# Altium PCB NODE_Module.PcbDoc (part 2 of 3)
Units mil, origin at the board's own origin, x right, y up, seen from the top; angles counter-clockwise.
Board outline 4300 x 3800 mil, 4 copper layers (Top Layer, Int1 (GND), Int2 (GND), Bottom Layer), stack 43.712 mil thick; 95 components, 106 nets, 420 pads, 98 vias.
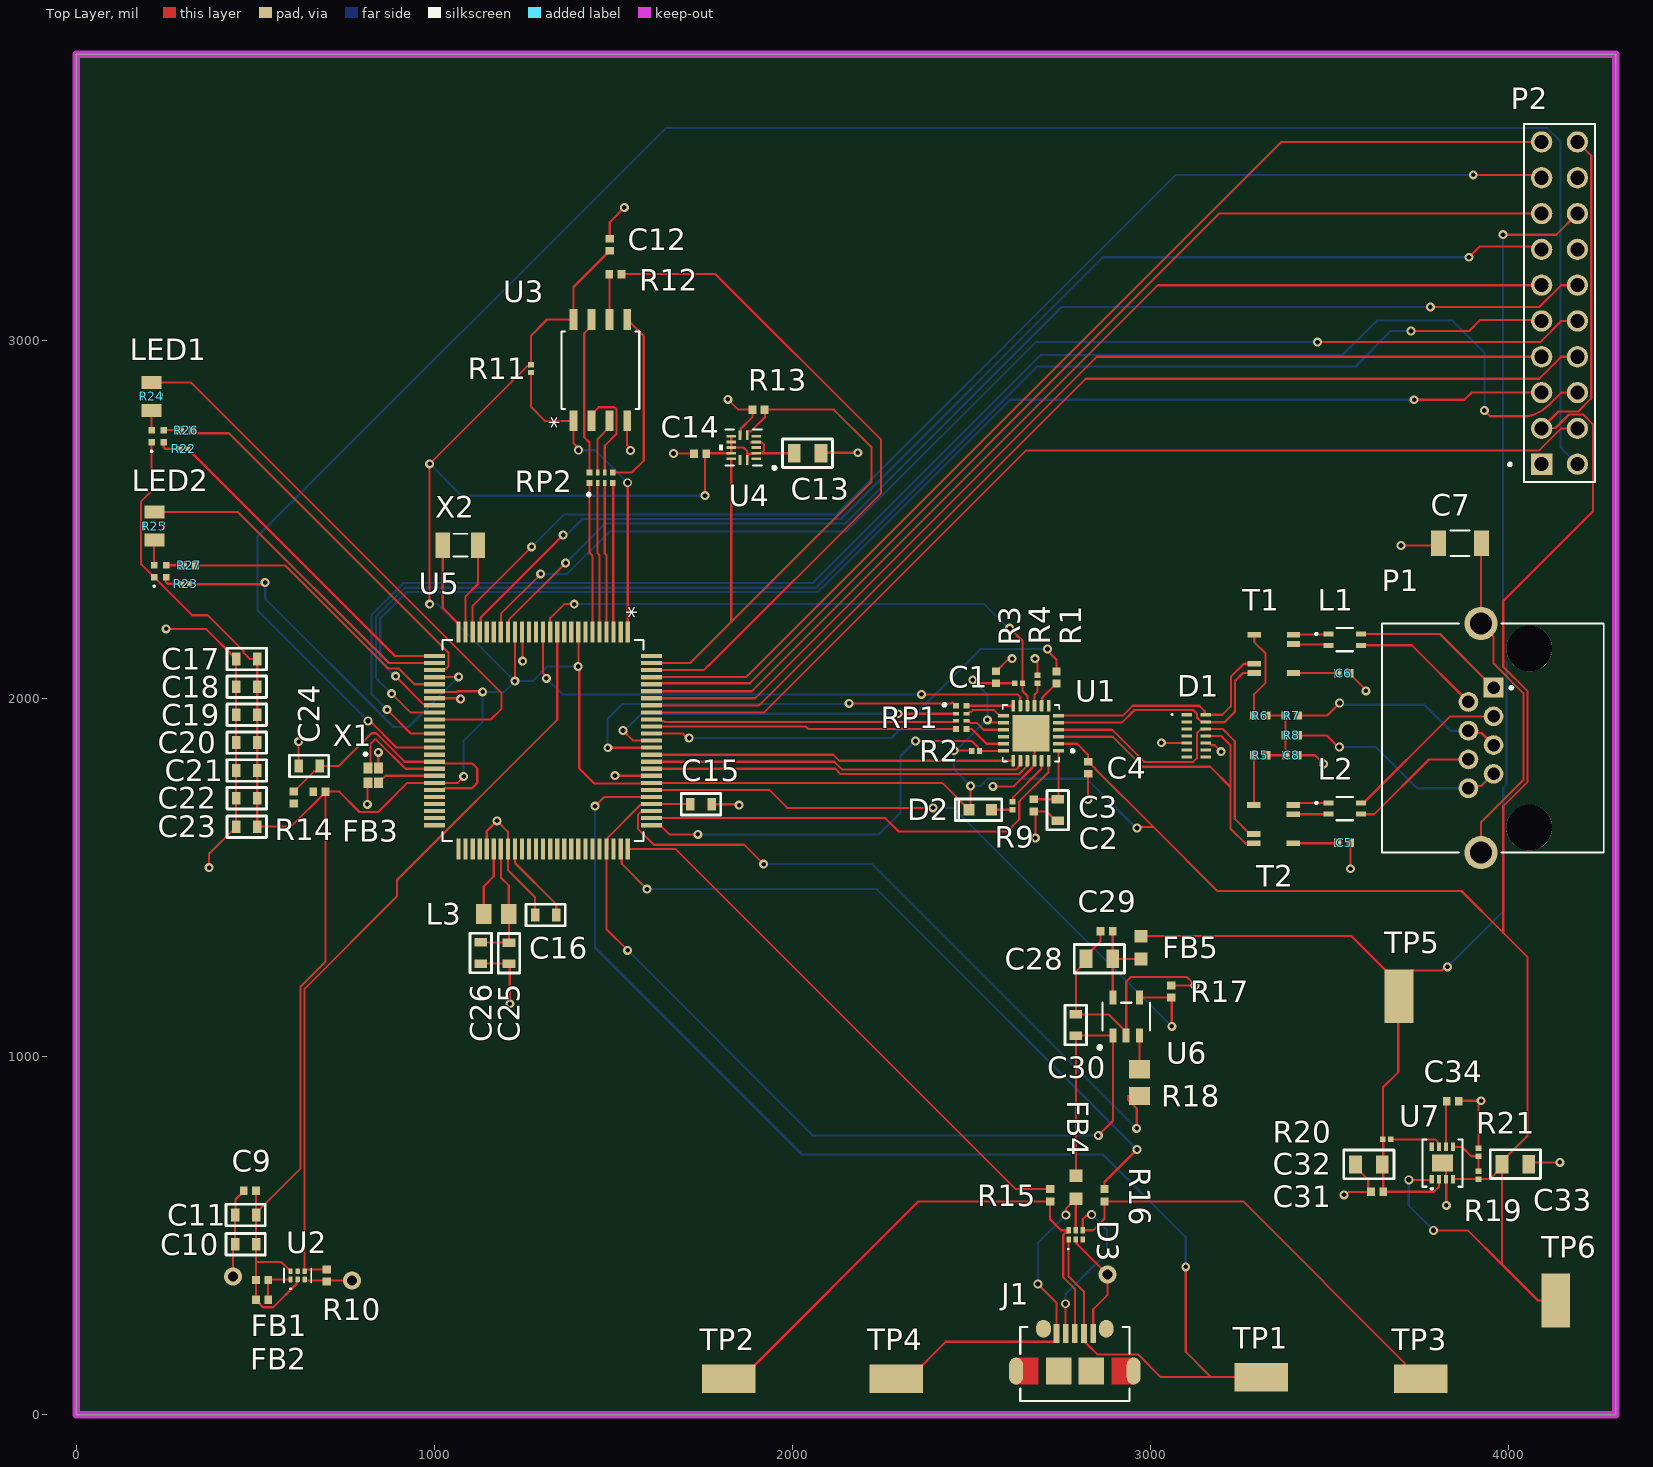
[diagram p0: Top Layer view]

## Part data (continued)
R5 R6 R7 R8: library part CRCW040275R0FKED, "VISHAY         CRCW040275R0FKED.            Surface Mount Chip Resistor, Thick Film, AEC-Q200 CRCW Series, 75 ohm, 63 mW,  1%, 50 V", Case Code (Imperial)=0402, Case Code (Metric)=1005, Manufacturer=Vishay, Max Operating Temperature=155°C, Max Power Dissipation=63mW, Min Operating Temperature=-55°C, Package Quantity=10, Resistor Type="Thick Film", Supplier Part Number 1=541-75.0LCT-ND, Temperature Coefficient=100ppm/°C, Tolerance=1%, Voltage Rating=50V, Case/Package=0402, Category="Chip SMD Resistors", ComponentLink1Description=https://datasheet.ciiva.com/11811/0900766b80d98824-11811348.pdf?src-supplier=RSComponents, ComponentLink1URL=https://datasheet.ciiva.com/11811/0900766b80d98824-11811348.pdf?src-supplier=RSComponents, ComponentLink2Description=https://datasheet.ciiva.com/2463/dcrcwe3-2463217.pdf?src-supplier=Digi-Key, ComponentLink2URL=https://datasheet.ciiva.com/2463/dcrcwe3-2463217.pdf?src-supplier=Digi-Key, ComponentLink3Description=https://datasheet.ciiva.com/2463/dcrcwe3-2463218.pdf?src-supplier=Digi-Key, ComponentLink3URL=https://datasheet.ciiva.com/2463/dcrcwe3-2463218.pdf?src-supplier=Digi-Key, ComponentLink4Description=https://datasheet.ciiva.com/2463/dcrcwe3-2463219.pdf?src-supplier=Digi-Key, ComponentLink4URL=https://datasheet.ciiva.com/2463/dcrcwe3-2463219.pdf?src-supplier=Digi-Key, ComponentLink5Description=https://datasheet.ciiva.com/16779/70201119-16779527.pdf?src-supplier=Allied+Electronics, ComponentLink5URL=https://datasheet.ciiva.com/16779/70201119-16779527.pdf?src-supplier=Allied+Electronics, ComponentLink6Description=https://datasheet.ciiva.com/16885/dcrcwe3-16885703.pdf?src-supplier=Avnet+Europe, ComponentLink6URL=https://datasheet.ciiva.com/16885/dcrcwe3-16885703.pdf?src-supplier=Avnet+Europe, ComponentLink7Description=https://datasheet.ciiva.com/7673/1697337-7673451.pdf?src-supplier=Element14, ComponentLink7URL=https://datasheet.ciiva.com/7673/1697337-7673451.pdf?src-supplier=Element14, ComponentLink8Description=https://datasheet.ciiva.com/7673/1697337-7673279.pdf?src-supplier=Element14, ComponentLink8URL=https://datasheet.ciiva.com/7673/1697337-7673279.pdf?src-supplier=Element14, Contact Plating=Tin, Depth=0.5mm, Features="Automotive AEC-Q200", Height=0.35mm, Lead Free="Lead Free", Length=1mm, Manufacturer Part Number=CRCW040275R0FKED, Military Standard=Not, Number of Terminations=2, Packaging="Tape and Reel", Power Rating=63mW, Pricing 1="1=0.10000, 10=0.03300, 100=0.01330, 1000=0.00596, 2500=0.00518, 5000=0.00428 (USD)", Radiation Hardening=No, REACH SVHC=Unknown, Resistance=75R, RoHS=Yes, Stock 1=3085, Supplier 1=Digi-Key, Termination=SMD/SMT, Voltage Rating (DC)=50V, Weight=2.3E-05oz, Width=0.5mm, Working Voltage=50V
R10 R13 R17: library part CRCW040210M0FKED, "RESISTOR, 0402, 10M, 1%, FULL REEL; Product Range:VISHAY - AEC-Q200 CRCW Series; Resistance:10Mohm; Power Rating:63mW; Resistance Tolerance:± 1%; Resistor Case Style:0402 [1005 Metric]; Resistor Element Material:Thick Film; ;RoHS Compliant: Yes", Case Code (Imperial)=0402, Case Code (Metric)=1005, Manufacturer=Vishay, Max Operating Temperature=155°C, Max Power Dissipation=63mW, Min Operating Temperature=-55°C, Package Quantity=10, Resistance=10MR, Resistor Type="Thick Film", Supplier Part Number 1=541-10.0MLCT-ND, Temperature Coefficient=100ppm/°C, Tolerance=1%, Voltage Rating=50V, Case/Package=0402, Category="Chip SMD Resistors", ComponentLink1Description=https://datasheet.ciiva.com/11811/0900766b80d98824-11811586.pdf?src-supplier=RSComponents, ComponentLink1URL=https://datasheet.ciiva.com/11811/0900766b80d98824-11811586.pdf?src-supplier=RSComponents, ComponentLink2Description=https://datasheet.ciiva.com/2463/dcrcwe3-2463089.pdf?src-supplier=Digi-Key, ComponentLink2URL=https://datasheet.ciiva.com/2463/dcrcwe3-2463089.pdf?src-supplier=Digi-Key, ComponentLink3Description=https://datasheet.ciiva.com/2463/dcrcwe3-2463088.pdf?src-supplier=Digi-Key, ComponentLink3URL=https://datasheet.ciiva.com/2463/dcrcwe3-2463088.pdf?src-supplier=Digi-Key, ComponentLink4Description=https://datasheet.ciiva.com/2463/dcrcwe3-2463090.pdf?src-supplier=Digi-Key, ComponentLink4URL=https://datasheet.ciiva.com/2463/dcrcwe3-2463090.pdf?src-supplier=Digi-Key, ComponentLink5Description=https://datasheet.ciiva.com/5552/dcrcwe3-109170-5552597.pdf?src-supplier=Mouser, ComponentLink5URL=https://datasheet.ciiva.com/5552/dcrcwe3-109170-5552597.pdf?src-supplier=Mouser, ComponentLink6Description=https://datasheet.ciiva.com/16881/dcrcwe3-16881451.pdf?src-supplier=Avnet+Europe, ComponentLink6URL=https://datasheet.ciiva.com/16881/dcrcwe3-16881451.pdf?src-supplier=Avnet+Europe, ComponentLink7Description=https://datasheet.ciiva.com/26316/fld-crcw-e3-data-en-26316614.pdf?src-supplier=Distrelec, ComponentLink7URL=https://datasheet.ciiva.com/26316/fld-crcw-e3-data-en-26316614.pdf?src-supplier=Distrelec, ComponentLink8Description=https://datasheet.ciiva.com/16773/70201119-16773258.pdf?src-supplier=Allied+Electronics, ComponentLink8URL=https://datasheet.ciiva.com/16773/70201119-16773258.pdf?src-supplier=Allied+Electronics, Contact Plating=Tin, Depth=0.5mm, Features="Automotive AEC-Q200", Height=0.35mm, Lead Free="Lead Free", Length=1mm, Manufacturer Part Number=CRCW040210M0FKED, Military Standard=Not, Mount="Surface Mount", Number of Terminations=2, Packaging="Tape and Reel", Power Rating=63mW, Pricing 1="1=0.10000, 10=0.03300, 100=0.01330, 1000=0.00596, 2500=0.00518, 5000=0.00428 (USD)", Radiation Hardening=No, REACH SVHC=Unknown, RoHS=Yes, Stock 1=167645, Supplier 1=Digi-Key, Termination=SMD/SMT, Voltage Rating (DC)=50V, Weight=2.3E-05oz, Width=0.02inch
R11: library part CRCW0201330KFNED, "VISHAY   CRCW0201330KFNED   Surface Mount Chip Resistor, Thick Film, AEC-Q200 CRCW Series, 330 kohm, 50 mW,  1%, 30 V", Case Code (Imperial)=0201, Case Code (Metric)=0603, Manufacturer=Vishay, Max Operating Temperature=155°C, Max Power Dissipation=50mW, Min Operating Temperature=-55°C, Package Quantity=10000, Resistance=330kR, Resistor Type="Thick Film", Supplier Part Number 1=541-CRCW0201330KFNEDCT-ND, Temperature Coefficient=200ppm/°C, Tolerance=1%, Voltage Rating=30V, Case/Package=0201, Category="Chip SMD Resistors", ComponentLink1Description=https://datasheet.ciiva.com/22708/1719906-22708398.pdf?src-supplier=Element14, ComponentLink1URL=https://datasheet.ciiva.com/22708/1719906-22708398.pdf?src-supplier=Element14, Contact Plating=Tin, Height=0.011inch, Lead Free="Lead Free", Length=0.024inch, Manufacturer Part Number=CRCW0201330KFNED, Number of Terminations=2, Packaging="Tape and Reel", Power Rating=50mW, Pricing 1="1=0.10000, 10=0.05700, 100=0.02300, 1000=0.01034, 2500=0.00897, 5000=0.00741 (USD)", Radiation Hardening=No, REACH SVHC=Unknown, RoHS=Yes, Stock 1=7255, Supplier 1=Digi-Key, Voltage Rating (DC)=30V, Width=0.012inch
R12: library part CRCW040222R0FKED, "VISHAY - CRCW040222R0FKED. - Resistor Case Style:0402 [1005 Metric], 22ohm", Case Code (Imperial)=0402, Case Code (Metric)=1005, Manufacturer=Vishay, Max Operating Temperature=155°C, Max Power Dissipation=63mW, Min Operating Temperature=-55°C, Package Quantity=10, Resistor Type="Thick Film", Supplier Part Number 1=541-22.0LCT-ND, Temperature Coefficient=100ppm/°C, Tolerance=1%, Voltage Rating=50V, Case/Package=0402, Category="Chip SMD Resistors", ComponentLink1Description=https://datasheet.ciiva.com/11809/0900766b80d98824-11809869.pdf?src-supplier=RSComponents, ComponentLink1URL=https://datasheet.ciiva.com/11809/0900766b80d98824-11809869.pdf?src-supplier=RSComponents, ComponentLink2Description=https://datasheet.ciiva.com/3256/dcrcwe3-3256250.pdf?src-supplier=Avnet, ComponentLink2URL=https://datasheet.ciiva.com/3256/dcrcwe3-3256250.pdf?src-supplier=Avnet, ComponentLink3Description=https://datasheet.ciiva.com/16776/70201119-16776426.pdf?src-supplier=Allied+Electronics, ComponentLink3URL=https://datasheet.ciiva.com/16776/70201119-16776426.pdf?src-supplier=Allied+Electronics, ComponentLink4Description=https://datasheet.ciiva.com/26316/fld-crcw-e3-data-en-26316666.pdf?src-supplier=Distrelec, ComponentLink4URL=https://datasheet.ciiva.com/26316/fld-crcw-e3-data-en-26316666.pdf?src-supplier=Distrelec, ComponentLink5Description=https://datasheet.ciiva.com/16886/dcrcwe3-16886668.pdf?src-supplier=Avnet+Europe, ComponentLink5URL=https://datasheet.ciiva.com/16886/dcrcwe3-16886668.pdf?src-supplier=Avnet+Europe, ComponentLink6Description=https://datasheet.ciiva.com/7672/1697337-7672781.pdf?src-supplier=Element14, ComponentLink6URL=https://datasheet.ciiva.com/7672/1697337-7672781.pdf?src-supplier=Element14, ComponentLink7Description=https://datasheet.ciiva.com/7672/1697337-7672782.pdf?src-supplier=Element14, ComponentLink7URL=https://datasheet.ciiva.com/7672/1697337-7672782.pdf?src-supplier=Element14, ComponentLink8Description=https://datasheet.ciiva.com/2463/dcrcwe3-2463093.pdf?src-supplier=Digi-Key, ComponentLink8URL=https://datasheet.ciiva.com/2463/dcrcwe3-2463093.pdf?src-supplier=Digi-Key, ComponentLink9Description=https://datasheet.ciiva.com/16396/dcrcwe3-16396918.pdf?src-supplier=Future+Electronics, ComponentLink9URL=https://datasheet.ciiva.com/16396/dcrcwe3-16396918.pdf?src-supplier=Future+Electronics, ComponentLink10Description=https://datasheet.ciiva.com/3256/dcrcwe3-3256249.pdf?src-supplier=Avnet, ComponentLink10URL=https://datasheet.ciiva.com/3256/dcrcwe3-3256249.pdf?src-supplier=Avnet, ComponentLink11Description=https://datasheet.ciiva.com/5552/dcrcwe3-109170-5552201.pdf?src-supplier=Mouser, ComponentLink11URL=https://datasheet.ciiva.com/5552/dcrcwe3-109170-5552201.pdf?src-supplier=Mouser, ComponentLink12Description=https://datasheet.ciiva.com/2463/dcrcwe3-2463091.pdf?src-supplier=Digi-Key, ComponentLink12URL=https://datasheet.ciiva.com/2463/dcrcwe3-2463091.pdf?src-supplier=Digi-Key, ComponentLink13Description=https://datasheet.ciiva.com/2463/dcrcwe3-2463092.pdf?src-supplier=Digi-Key, ComponentLink13URL=https://datasheet.ciiva.com/2463/dcrcwe3-2463092.pdf?src-supplier=Digi-Key, Contact Plating=Tin, Depth=0.5mm, Features="Automotive AEC-Q200", Height=0.35mm, Lead Free="Lead Free", Length=1mm, Manufacturer Part Number=CRCW040222R0FKED, Military Standard=Not, Mount="Surface Mount", Number of Terminations=2, Packaging="Tape and Reel", Power Rating=63mW, Pricing 1="1=0.10000, 10=0.03300, 100=0.01330, 1000=0.00596, 2500=0.00518, 5000=0.00428 (USD)", Radiation Hardening=No, REACH SVHC=Unknown, Resistance=22R, RoHS=Yes, Stock 1=167744, Supplier 1=Digi-Key, Termination=SMD/SMT, Voltage Rating (DC)=50V, Weight=2.3E-05oz, Width=0.02inch
R14: library part CRCW04021R00FNED, "RES SMD 1 OHM 1% 1/16W 0402", Case Code (Imperial)=0402, Case Code (Metric)=1005, Manufacturer=Vishay, Max Operating Temperature=155°C, Max Power Dissipation=63mW, Min Operating Temperature=-55°C, Package Quantity=10000, Resistor Type="Thick Film", Supplier Part Number 1=541-1.00LCT-ND, Temperature Coefficient=200ppm/°C, Tolerance=1%, Voltage Rating=50V, Case/Package=0402, Category="Chip SMD Resistors", ComponentLink1Description=https://datasheet.ciiva.com/2560/dcrcwe3-2560101.pdf?src-supplier=Digi-Key, ComponentLink1URL=https://datasheet.ciiva.com/2560/dcrcwe3-2560101.pdf?src-supplier=Digi-Key, ComponentLink2Description=https://datasheet.ciiva.com/6027/1697337-6027861.pdf?src-supplier=Farnell, ComponentLink2URL=https://datasheet.ciiva.com/6027/1697337-6027861.pdf?src-supplier=Farnell, ComponentLink3Description=https://datasheet.ciiva.com/2560/dcrcwe3-2560102.pdf?src-supplier=Digi-Key, ComponentLink3URL=https://datasheet.ciiva.com/2560/dcrcwe3-2560102.pdf?src-supplier=Digi-Key, ComponentLink4Description=https://datasheet.ciiva.com/2560/dcrcwe3-2560103.pdf?src-supplier=Digi-Key, ComponentLink4URL=https://datasheet.ciiva.com/2560/dcrcwe3-2560103.pdf?src-supplier=Digi-Key, ComponentLink5Description=https://datasheet.ciiva.com/3256/dcrcwe3-3256199.pdf?src-supplier=Avnet, ComponentLink5URL=https://datasheet.ciiva.com/3256/dcrcwe3-3256199.pdf?src-supplier=Avnet, ComponentLink6Description=https://datasheet.ciiva.com/3256/dcrcwe3-3256200.pdf?src-supplier=Avnet, ComponentLink6URL=https://datasheet.ciiva.com/3256/dcrcwe3-3256200.pdf?src-supplier=Avnet, ComponentLink7Description=https://datasheet.ciiva.com/5552/dcrcwe3-109170-5552232.pdf?src-supplier=Mouser, ComponentLink7URL=https://datasheet.ciiva.com/5552/dcrcwe3-109170-5552232.pdf?src-supplier=Mouser, ComponentLink8Description=https://datasheet.ciiva.com/16436/dcrcwe3-16436173.pdf?src-supplier=Future+Electronics, ComponentLink8URL=https://datasheet.ciiva.com/16436/dcrcwe3-16436173.pdf?src-supplier=Future+Electronics, ComponentLink9Description=https://datasheet.ciiva.com/7841/125364-7841807.pdf?src-supplier=Element14, ComponentLink9URL=https://datasheet.ciiva.com/7841/125364-7841807.pdf?src-supplier=Element14, Contact Plating=Tin, Depth=0.5mm, Features="Automotive AEC-Q200", Height=0.016inch, Lead Free="Lead Free", Length=1mm, Manufacturer Part Number=CRCW04021R00FNED, Military Standard=Not, Mount="Surface Mount", Number of Pins=2, Number of Terminations=2, Packaging="Tape and Reel", Power Rating=63mW, Pricing 1="1=0.10000, 10=0.05000, 100=0.02040, 1000=0.00914, 2500=0.00794, 5000=0.00656 (USD)", Radiation Hardening=No, REACH SVHC=Unknown, Resistance=1R, RoHS=Yes, Stock 1=16685, Supplier 1=Digi-Key, Termination=SMD/SMT, Voltage Rating (DC)=50V, Weight=2.3E-05oz, Width=0.02inch
R15 R16: library part CRCW040215R0FKED, "VISHAY - CRCW040215R0FKED - SMD Chip Resistor, 0402 [1005 Metric], 15 ohm, CRCW e3 Series, 50 V, Thick Film, 63 mW", Case Code (Imperial)=0402, Case Code (Metric)=1005, Manufacturer=Vishay, Max Operating Temperature=155°C, Max Power Dissipation=63mW, Min Operating Temperature=-55°C, Package Quantity=10, Resistor Type="Thick Film", Supplier Part Number 1=541-15.0LCT-ND, Temperature Coefficient=100ppm/°C, Tolerance=1%, Voltage Rating=50V, Case/Package=0402, Category="Chip SMD Resistors", ComponentLink1Description=https://datasheet.ciiva.com/11812/0900766b80d98824-11812193.pdf?src-supplier=RSComponents, ComponentLink1URL=https://datasheet.ciiva.com/11812/0900766b80d98824-11812193.pdf?src-supplier=RSComponents, ComponentLink2Description=https://datasheet.ciiva.com/5550/dcrcwe3-109170-5550213.pdf?src-supplier=Mouser, ComponentLink2URL=https://datasheet.ciiva.com/5550/dcrcwe3-109170-5550213.pdf?src-supplier=Mouser, ComponentLink3Description=https://datasheet.ciiva.com/2463/dcrcwe3-2463641.pdf?src-supplier=Digi-Key, ComponentLink3URL=https://datasheet.ciiva.com/2463/dcrcwe3-2463641.pdf?src-supplier=Digi-Key, ComponentLink4Description=https://datasheet.ciiva.com/2463/dcrcwe3-2463642.pdf?src-supplier=Digi-Key, ComponentLink4URL=https://datasheet.ciiva.com/2463/dcrcwe3-2463642.pdf?src-supplier=Digi-Key, ComponentLink5Description=https://datasheet.ciiva.com/16778/70201119-16778045.pdf?src-supplier=Allied+Electronics, ComponentLink5URL=https://datasheet.ciiva.com/16778/70201119-16778045.pdf?src-supplier=Allied+Electronics, ComponentLink6Description=https://datasheet.ciiva.com/7777/1697337-7777205.pdf?src-supplier=Element14, ComponentLink6URL=https://datasheet.ciiva.com/7777/1697337-7777205.pdf?src-supplier=Element14, ComponentLink7Description=https://datasheet.ciiva.com/2463/dcrcwe3-2463640.pdf?src-supplier=Digi-Key, ComponentLink7URL=https://datasheet.ciiva.com/2463/dcrcwe3-2463640.pdf?src-supplier=Digi-Key, ComponentLink8Description=https://datasheet.ciiva.com/26316/fld-crcw-e3-data-en-26316664.pdf?src-supplier=Distrelec, ComponentLink8URL=https://datasheet.ciiva.com/26316/fld-crcw-e3-data-en-26316664.pdf?src-supplier=Distrelec, ComponentLink9Description=https://datasheet.ciiva.com/16880/dcrcwe3-16880876.pdf?src-supplier=Avnet+Europe, ComponentLink9URL=https://datasheet.ciiva.com/16880/dcrcwe3-16880876.pdf?src-supplier=Avnet+Europe, ComponentLink10Description=https://datasheet.ciiva.com/22869/70201119-22869118.pdf?src-supplier=Allied+Electronics, ComponentLink10URL=https://datasheet.ciiva.com/22869/70201119-22869118.pdf?src-supplier=Allied+Electronics, ComponentLink11Description=https://datasheet.ciiva.com/16393/dcrcwe3-16393535.pdf?src-supplier=Future+Electronics, ComponentLink11URL=https://datasheet.ciiva.com/16393/dcrcwe3-16393535.pdf?src-supplier=Future+Electronics, ComponentLink12Description=https://datasheet.ciiva.com/22740/1533075-22740367.pdf?src-supplier=Element14, ComponentLink12URL=https://datasheet.ciiva.com/22740/1533075-22740367.pdf?src-supplier=Element14, Contact Plating=Tin, Depth=0.5mm, Features="Automotive AEC-Q200", Height=0.35mm, Lead Free="Lead Free", Length=1mm, Manufacturer Part Number=CRCW040215R0FKED, Military Standard=Not, Number of Terminations=2, Packaging="Tape and Reel", Power Rating=63mW, Pricing 1="1=0.10000, 10=0.03300, 100=0.01330, 1000=0.00596, 2500=0.00518, 5000=0.00428 (USD)", Radiation Hardening=No, REACH SVHC=Unknown, Resistance=15R, RoHS=Yes, Stock 1=18, Supplier 1=Digi-Key, Termination=SMD/SMT, Voltage Rating (DC)=50V, Weight=2.3E-05oz, Width=0.5mm
R18: library part RC0805JR-070RL, "Surface Mount Thick Film Resistor, RC Series, 125 mW, - 5%, 150 V, 0805 [2012 Metric]", Case Code (Imperial)=0805, Case Code (Metric)=2012, Manufacturer=Yageo, Max Operating Temperature=155°C, Min Operating Temperature=-55°C, Power Rating=125mW, Resistance=0mR, Supplier Part Number 1=311-0.0ARCT-ND, Temperature Coefficient=200ppm/°C, Tolerance=5%, Voltage Rating=150V, Case/Package=0805, Category="Chip SMD Resistors", ComponentLink1Description=https://datasheet.ciiva.com/7941/1738694-7941861.pdf?src-supplier=Element14, ComponentLink1URL=https://datasheet.ciiva.com/7941/1738694-7941861.pdf?src-supplier=Element14, ComponentLink2Description=https://datasheet.ciiva.com/11819/0900766b8106beab-11819430.pdf?src-supplier=RSComponents, ComponentLink2URL=https://datasheet.ciiva.com/11819/0900766b8106beab-11819430.pdf?src-supplier=RSComponents, ComponentLink3Description=https://datasheet.ciiva.com/7941/1738694-7941862.pdf?src-supplier=Element14, ComponentLink3URL=https://datasheet.ciiva.com/7941/1738694-7941862.pdf?src-supplier=Element14, ComponentLink4Description=https://datasheet.ciiva.com/7941/1738694-7941863.pdf?src-supplier=Element14, ComponentLink4URL=https://datasheet.ciiva.com/7941/1738694-7941863.pdf?src-supplier=Element14, ComponentLink5Description=https://datasheet.ciiva.com/15190/getdatasheetpartid-330685-15190028.pdf?src-supplier=Verical, ComponentLink5URL=https://datasheet.ciiva.com/15190/getdatasheetpartid-330685-15190028.pdf?src-supplier=Verical, Composition="Thick Film", Contact Plating=Tin,Matte, Depth=1.25mm, Height=0.5mm, Lead Free="Lead Free", Length=2mm, Manufacturer Part Number=RC0805JR-070RL, Military Standard=Not, Number of Pins=2, Packaging="Tape and Reel", Pricing 1="1=0.10000, 10=0.03500, 25=0.02480, 50=0.01900, 100=0.01400, 250=0.01072, 500=0.00856, 1000=0.00631 (USD)", Radiation Hardening=No, REACH SVHC=Unknown, RoHS=Yes, Stock 1=7454053, Supplier 1=Digi-Key, Termination=SMD/SMT, Voltage Rating (DC)=150V, Width=1.25mm
R19: library part CRCW0201180KFNED, "VISHAY - CRCW0201180KFNED - SMD Chip Resistor, 0201 [0603 Metric], 180 kohm, CRCW e3 Series, 30 V, Thick Film, 50 mW", Case Code (Imperial)=0201, Case Code (Metric)=0603, Manufacturer=Vishay, Max Operating Temperature=155°C, Min Operating Temperature=-55°C, Power Rating=50mW, Resistance=180kR, Resistor Type="Thick Film", Supplier Part Number 1=541-CRCW0201180KFNEDCT-ND, Temperature Coefficient=200ppm/°C, Tolerance=1%, Voltage Rating=30V, Case/Package=0201, Category="Chip SMD Resistors", ComponentLink1Description=https://datasheet.ciiva.com/22665/1700795-22665798.pdf?src-supplier=Element14, ComponentLink1URL=https://datasheet.ciiva.com/22665/1700795-22665798.pdf?src-supplier=Element14, ComponentLink2Description=https://datasheet.ciiva.com/22692/1719906-22692745.pdf?src-supplier=Element14, ComponentLink2URL=https://datasheet.ciiva.com/22692/1719906-22692745.pdf?src-supplier=Element14, ComponentLink3Description=https://datasheet.ciiva.com/7714/1719906-7714127.pdf?src-supplier=Element14, ComponentLink3URL=https://datasheet.ciiva.com/7714/1719906-7714127.pdf?src-supplier=Element14, Contact Plating=Tin, Height=230um, Lead Free="Lead Free", Length=600um, Manufacturer Part Number=CRCW0201180KFNED, Packaging="Tape and Reel", Pricing 1="1=0.10000, 10=0.05700, 100=0.02300, 1000=0.01034, 2500=0.00897, 5000=0.00741 (USD)", Radiation Hardening=No, REACH SVHC=Unknown, RoHS=Yes, Stock 1=10120, Supplier 1=Digi-Key, Voltage Rating (DC)=30V, Width=300um
R20: library part CRCW020110K0FNED, "VISHAY - CRCW020110K0FNED. - Surface Mount Thick Film Resistor, AEC-Q200 CRCW Series, 10 kohm, 50 mW, -  1%, 30 V RoHS Compliant: Yes", Case Code (Imperial)=0201, Case Code (Metric)=0603, Manufacturer=Vishay, Max Operating Temperature=155°C, Max Power Dissipation=50mW, Min Operating Temperature=-55°C, Package Quantity=1, Resistance=10kR, Resistor Type="Thick Film", Supplier Part Number 1=541-10.0KABCT-ND, Temperature Coefficient=200ppm/°C, Tolerance=1%, Voltage Rating=30V, Case/Package=0201, Category="Chip SMD Resistors", ComponentLink1Description=https://datasheet.ciiva.com/2474/crcw0201e3-2474818.pdf?src-supplier=Digi-Key, ComponentLink1URL=https://datasheet.ciiva.com/2474/crcw0201e3-2474818.pdf?src-supplier=Digi-Key, ComponentLink2Description=https://datasheet.ciiva.com/7983/1719906-7983320.pdf?src-supplier=Element14, ComponentLink2URL=https://datasheet.ciiva.com/7983/1719906-7983320.pdf?src-supplier=Element14, ComponentLink3Description=https://datasheet.ciiva.com/16436/dcrcwe3-16436222.pdf?src-supplier=Future+Electronics, ComponentLink3URL=https://datasheet.ciiva.com/16436/dcrcwe3-16436222.pdf?src-supplier=Future+Electronics, ComponentLink4Description=https://datasheet.ciiva.com/2474/crcw0201e3-2474819.pdf?src-supplier=Digi-Key, ComponentLink4URL=https://datasheet.ciiva.com/2474/crcw0201e3-2474819.pdf?src-supplier=Digi-Key, ComponentLink5Description=https://datasheet.ciiva.com/2474/crcw0201e3-2474820.pdf?src-supplier=Digi-Key, ComponentLink5URL=https://datasheet.ciiva.com/2474/crcw0201e3-2474820.pdf?src-supplier=Digi-Key, ComponentLink6Description=https://datasheet.ciiva.com/22692/1719906-22692709.pdf?src-supplier=Element14, ComponentLink6URL=https://datasheet.ciiva.com/22692/1719906-22692709.pdf?src-supplier=Element14, ComponentLink7Description=https://datasheet.ciiva.com/7983/1719906-7983319.pdf?src-supplier=Element14, ComponentLink7URL=https://datasheet.ciiva.com/7983/1719906-7983319.pdf?src-supplier=Element14, ComponentLink8Description=https://datasheet.ciiva.com/22868/70202042-22868839.pdf?src-supplier=Allied+Electronics, ComponentLink8URL=https://datasheet.ciiva.com/22868/70202042-22868839.pdf?src-supplier=Allied+Electronics, Contact Plating=Tin, Depth=0.3mm, Height=0.011inch, Lead Free="Lead Free", Length=0.6mm, Manufacturer Part Number=CRCW020110K0FNED, Military Standard=Not, Mount="Surface Mount", Number of Pins=2, Number of Terminations=2, Packaging="Tape and Reel", Power Rating=50mW, Pricing 1="1=0.10000, 10=0.05700, 100=0.02300, 1000=0.01034, 2500=0.00897, 5000=0.00741 (USD)", Radiation Hardening=No, REACH SVHC=Unknown, RoHS=Yes, Stock 1=567966, Supplier 1=Digi-Key, Termination=SMD/SMT, Voltage Rating (DC)=30V, Weight=6E-06oz, Width=0.3mm
R21: library part CRCW0201110KFNED, "RES SMD 110K OHM 1% 1/20W 0201", Case Code (Imperial)=0201, Case Code (Metric)=0603, Manufacturer=Vishay, Max Operating Temperature=155°C, Max Power Dissipation=50mW, Min Operating Temperature=-55°C, Package Quantity=10000, Resistance=110kR, Resistor Type="Thick Film", Supplier Part Number 1=541-CRCW0201110KFNEDCT-ND, Temperature Coefficient=200ppm/°C, Tolerance=1%, Voltage Rating=30V, Case/Package=0201, Category="Chip SMD Resistors", ComponentLink1Description=https://datasheet.ciiva.com/8977/crcw0201e3-8977608.pdf?src-supplier=Avnet, ComponentLink1URL=https://datasheet.ciiva.com/8977/crcw0201e3-8977608.pdf?src-supplier=Avnet, ComponentLink2Description=https://datasheet.ciiva.com/22692/1719906-22692712.pdf?src-supplier=Element14, ComponentLink2URL=https://datasheet.ciiva.com/22692/1719906-22692712.pdf?src-supplier=Element14, ComponentLink3Description=https://datasheet.ciiva.com/2577/crcw0201e3-2577313.pdf?src-supplier=Digi-Key, ComponentLink3URL=https://datasheet.ciiva.com/2577/crcw0201e3-2577313.pdf?src-supplier=Digi-Key, ComponentLink4Description=https://datasheet.ciiva.com/22665/1700795-22665706.pdf?src-supplier=Element14, ComponentLink4URL=https://datasheet.ciiva.com/22665/1700795-22665706.pdf?src-supplier=Element14, Contact Plating=Tin, Height=0.011inch, Lead Free="Lead Free", Length=0.024inch, Manufacturer Part Number=CRCW0201110KFNED, Number of Terminations=2, Packaging="Tape and Reel", Power Rating=50mW, Pricing 1="1=0.10000, 10=0.05700, 100=0.02300, 1000=0.01034, 2500=0.00897, 5000=0.00741 (USD)", Radiation Hardening=No, REACH SVHC=Unknown, RoHS=Yes, Stock 1=6456, Supplier 1=Digi-Key, Voltage Rating (DC)=30V, Width=0.012inch
R22 R23: library part CRCW0201698RFNED, "RES SMD 698 OHM 1% 1/20W 0201", Case Code (Imperial)=0201, Case Code (Metric)=0603, Manufacturer=Vishay, Max Operating Temperature=155°C, Max Power Dissipation=50mW, Min Operating Temperature=-55°C, Package Quantity=10000, Resistor Type="Thick Film", Supplier Part Number 1=541-CRCW0201698RFNEDCT-ND, Temperature Coefficient=200ppm/°C, Tolerance=1%, Voltage Rating=30V, Case/Package=0201, Category="Chip SMD Resistors", ComponentLink1Description=https://datasheet.ciiva.com/2577/crcw0201e3-2577171.pdf?src-supplier=Digi-Key, ComponentLink1URL=https://datasheet.ciiva.com/2577/crcw0201e3-2577171.pdf?src-supplier=Digi-Key, ComponentLink2Description=https://datasheet.ciiva.com/8922/crcw0201e3-8922646.pdf?src-supplier=Avnet, ComponentLink2URL=https://datasheet.ciiva.com/8922/crcw0201e3-8922646.pdf?src-supplier=Avnet, ComponentLink3Description=https://datasheet.ciiva.com/7672/1719906-7672440.pdf?src-supplier=Element14, ComponentLink3URL=https://datasheet.ciiva.com/7672/1719906-7672440.pdf?src-supplier=Element14, ComponentLink4Description=https://datasheet.ciiva.com/7672/1719906-7672441.pdf?src-supplier=Element14, ComponentLink4URL=https://datasheet.ciiva.com/7672/1719906-7672441.pdf?src-supplier=Element14, ComponentLink5Description=https://datasheet.ciiva.com/22674/1700795-22674828.pdf?src-supplier=Element14, ComponentLink5URL=https://datasheet.ciiva.com/22674/1700795-22674828.pdf?src-supplier=Element14, Contact Plating=Tin, Height=0.011inch, Lead Free="Lead Free", Length=0.024inch, Manufacturer Part Number=CRCW0201698RFNED, Number of Terminations=2, Packaging="Tape and Reel", Power Rating=50mW, Pricing 1="1=0.10000, 10=0.05700, 100=0.02300, 1000=0.01034, 2500=0.00897, 5000=0.00741 (USD)", Radiation Hardening=No, REACH SVHC=Unknown, Resistance=698R, RoHS=Yes, Stock 1=10000, Supplier 1=Digi-Key, Voltage Rating (DC)=30V, Width=0.012inch
R24 R25: library part CRCW08052K32FKEA, "VISHAY - CRCW08052K32FKEA - RES, THICK FILM, 2K32, 1%, 0.125W, 0805", Case Code (Imperial)=0805, Case Code (Metric)=2012, Manufacturer=Vishay, Max Operating Temperature=155°C, Max Power Dissipation=125mW, Min Operating Temperature=-55°C, Package Quantity=10, Resistance=2.32kR, Resistor Type="Thick Film", Supplier Part Number 1=541-2.32KCCT-ND, Temperature Coefficient=100ppm/°C, Tolerance=1%, Voltage Rating=150V, Case/Package=0805, Category="Chip SMD Resistors", ComponentLink1Description=https://datasheet.ciiva.com/16435/dcrcwe3-16435909.pdf?src-supplier=Future+Electronics, ComponentLink1URL=https://datasheet.ciiva.com/16435/dcrcwe3-16435909.pdf?src-supplier=Future+Electronics, ComponentLink2Description=https://datasheet.ciiva.com/3258/dcrcwe3-3258438.pdf?src-supplier=Avnet, ComponentLink2URL=https://datasheet.ciiva.com/3258/dcrcwe3-3258438.pdf?src-supplier=Avnet, ComponentLink3Description=https://datasheet.ciiva.com/3258/dcrcwe3-3258439.pdf?src-supplier=Avnet, ComponentLink3URL=https://datasheet.ciiva.com/3258/dcrcwe3-3258439.pdf?src-supplier=Avnet, ComponentLink4Description=https://datasheet.ciiva.com/2525/dcrcwe3-2525755.pdf?src-supplier=Digi-Key, ComponentLink4URL=https://datasheet.ciiva.com/2525/dcrcwe3-2525755.pdf?src-supplier=Digi-Key, ComponentLink5Description=https://datasheet.ciiva.com/2525/dcrcwe3-2525756.pdf?src-supplier=Digi-Key, ComponentLink5URL=https://datasheet.ciiva.com/2525/dcrcwe3-2525756.pdf?src-supplier=Digi-Key, ComponentLink6Description=https://datasheet.ciiva.com/2525/dcrcwe3-2525757.pdf?src-supplier=Digi-Key, ComponentLink6URL=https://datasheet.ciiva.com/2525/dcrcwe3-2525757.pdf?src-supplier=Digi-Key, ComponentLink7Description=https://datasheet.ciiva.com/7670/1697337-7670286.pdf?src-supplier=Element14, ComponentLink7URL=https://datasheet.ciiva.com/7670/1697337-7670286.pdf?src-supplier=Element14, ComponentLink8Description=https://datasheet.ciiva.com/17201/dcrcwe3-17201132.pdf?src-supplier=Avnet+Europe, ComponentLink8URL=https://datasheet.ciiva.com/17201/dcrcwe3-17201132.pdf?src-supplier=Avnet+Europe, ComponentLink9Description=https://datasheet.ciiva.com/7670/1697337-7670285.pdf?src-supplier=Element14, ComponentLink9URL=https://datasheet.ciiva.com/7670/1697337-7670285.pdf?src-supplier=Element14, ComponentLink10Description=https://datasheet.ciiva.com/22675/1825492-22675197.pdf?src-supplier=Element14, ComponentLink10URL=https://datasheet.ciiva.com/22675/1825492-22675197.pdf?src-supplier=Element14, ComponentLink11Description=https://datasheet.ciiva.com/16769/70201119-16769374.pdf?src-supplier=Allied+Electronics, ComponentLink11URL=https://datasheet.ciiva.com/16769/70201119-16769374.pdf?src-supplier=Allied+Electronics, Contact Plating=Tin, Depth=1.25mm, Features="Automotive AEC-Q200", Height=0.02inch, Lead Free="Lead Free", Length=2mm, Manufacturer Part Number=CRCW08052K32FKEA, Military Standard=Not, Number of Pins=2, Number of Terminations=2, Packaging="Tape and Reel", Power Rating=125mW, Pricing 1="1=0.10000, 10=0.05700, 100=0.02310, 1000=0.01039, 2500=0.00902 (USD)", Radiation Hardening=No, REACH SVHC=Unknown, RoHS=Yes, Stock 1=20040, Supplier 1=Digi-Key, Termination=SMD/SMT, Voltage Rating (DC)=150V, Weight=0.000194oz, Width=1.25mm
R26 R27: library part CRCW0402910RFKED, "Res Thick Film 0402 910 Ohm 1% 0.063W(1/16W) ±100ppm/C Pad SMD Automotive T/R", Case Code (Imperial)=0402, Case Code (Metric)=1005, Manufacturer=Vishay, Max Operating Temperature=155°C, Max Power Dissipation=63mW, Min Operating Temperature=-55°C, Package Quantity=10, Resistor Type="Thick Film", Supplier Part Number 1=541-910LCT-ND, Temperature Coefficient=100ppm/°C, Tolerance=1%, Voltage Rating=50V, Case/Package=0402, Category="Chip SMD Resistors", ComponentLink1Description=https://datasheet.ciiva.com/11818/0900766b80d98824-11818156.pdf?src-supplier=RSComponents, ComponentLink1URL=https://datasheet.ciiva.com/11818/0900766b80d98824-11818156.pdf?src-supplier=RSComponents, ComponentLink2Description=https://datasheet.ciiva.com/5545/dcrcwe3-109170-5545657.pdf?src-supplier=Mouser, ComponentLink2URL=https://datasheet.ciiva.com/5545/dcrcwe3-109170-5545657.pdf?src-supplier=Mouser, ComponentLink3Description=https://datasheet.ciiva.com/22674/1847332-22674841.pdf?src-supplier=Element14, ComponentLink3URL=https://datasheet.ciiva.com/22674/1847332-22674841.pdf?src-supplier=Element14, ComponentLink4Description=https://datasheet.ciiva.com/2463/dcrcwe3-2463999.pdf?src-supplier=Digi-Key, ComponentLink4URL=https://datasheet.ciiva.com/2463/dcrcwe3-2463999.pdf?src-supplier=Digi-Key, ComponentLink5Description=https://datasheet.ciiva.com/7672/1697337-7672517.pdf?src-supplier=Element14, ComponentLink5URL=https://datasheet.ciiva.com/7672/1697337-7672517.pdf?src-supplier=Element14, ComponentLink6Description=https://datasheet.ciiva.com/16778/70201119-16778533.pdf?src-supplier=Allied+Electronics, ComponentLink6URL=https://datasheet.ciiva.com/16778/70201119-16778533.pdf?src-supplier=Allied+Electronics, ComponentLink7Description=https://datasheet.ciiva.com/16426/dcrcwe3-16426299.pdf?src-supplier=Future+Electronics, ComponentLink7URL=https://datasheet.ciiva.com/16426/dcrcwe3-16426299.pdf?src-supplier=Future+Electronics, ComponentLink8Description=https://datasheet.ciiva.com/22706/1697337-22706347.pdf?src-supplier=Element14, ComponentLink8URL=https://datasheet.ciiva.com/22706/1697337-22706347.pdf?src-supplier=Element14, ComponentLink9Description=https://datasheet.ciiva.com/2463/dcrcwe3-2463997.pdf?src-supplier=Digi-Key, ComponentLink9URL=https://datasheet.ciiva.com/2463/dcrcwe3-2463997.pdf?src-supplier=Digi-Key, ComponentLink10Description=https://datasheet.ciiva.com/2463/dcrcwe3-2463998.pdf?src-supplier=Digi-Key, ComponentLink10URL=https://datasheet.ciiva.com/2463/dcrcwe3-2463998.pdf?src-supplier=Digi-Key, ComponentLink11Description=https://datasheet.ciiva.com/7672/1697337-7672518.pdf?src-supplier=Element14, ComponentLink11URL=https://datasheet.ciiva.com/7672/1697337-7672518.pdf?src-supplier=Element14, Contact Plating=Tin, Depth=0.5mm, Features="Automotive AEC-Q200", Height=0.35mm, Lead Free="Lead Free", Length=1mm, Manufacturer Part Number=CRCW0402910RFKED, Military Standard=Not, Number of Terminations=2, Packaging="Tape and Reel", Power Rating=63mW, Pricing 1="1=0.10000, 10=0.03300, 100=0.01330, 1000=0.00596, 2500=0.00518, 5000=0.00428 (USD)", Radiation Hardening=No, REACH SVHC=Unknown, Resistance=910R, RoHS=Yes, Stock 1=32719, Supplier 1=Digi-Key, Termination=SMD/SMT, Voltage Rating (DC)=50V, Weight=2.3E-05oz, Width=0.5mm
RP1: library part YC124-FR-0749R9L, "Res Thick Film Array 49.9 Ohm 1% 200ppm/C ISOL Molded 8-Pin 0804(4 X 0402) Convex SMD Paper T/R", Case/Package=0402, Manufacturer=Yageo, Max Operating Temperature=155°C, Min Operating Temperature=-55°C, Number of Resistors=4, Package Quantity=1, Power Dissipation=62.5mW, Supplier Part Number 1=YC124F-49.9CT-ND, Temperature Coefficient=200ppm/°C, Tolerance=1%, Working Voltage=50V, Category="Resistor Arrays", Circuit Type=Isolated, ComponentLink1Description=https://datasheet.ciiva.com/2689/pyu-yc-tc124-51-rohs-l-3-2689456.pdf?src-supplier=Digi-Key, ComponentLink1URL=https://datasheet.ciiva.com/2689/pyu-yc-tc124-51-rohs-l-3-2689456.pdf?src-supplier=Digi-Key, ComponentLink2Description=https://datasheet.ciiva.com/28381/pyu-yc-tc124-51-rohs-l-2-28381383.pdf?src-supplier=Avnet+Europe, ComponentLink2URL=https://datasheet.ciiva.com/28381/pyu-yc-tc124-51-rohs-l-2-28381383.pdf?src-supplier=Avnet+Europe, ComponentLink3Description=https://datasheet.ciiva.com/16961/pyu-yc-tc124-51-rohs-l-2-16961496.pdf?src-supplier=Avnet+Europe, ComponentLink3URL=https://datasheet.ciiva.com/16961/pyu-yc-tc124-51-rohs-l-2-16961496.pdf?src-supplier=Avnet+Europe, ComponentLink4Description=https://datasheet.ciiva.com/17470/pyu-yc-tc124-51-rohs-l-3-17470984.pdf?src-supplier=Future+Electronics, ComponentLink4URL=https://datasheet.ciiva.com/17470/pyu-yc-tc124-51-rohs-l-3-17470984.pdf?src-supplier=Future+Electronics, ComponentLink5Description=https://datasheet.ciiva.com/2689/pyu-yc-tc124-51-rohs-l-3-2689454.pdf?src-supplier=Digi-Key, ComponentLink5URL=https://datasheet.ciiva.com/2689/pyu-yc-tc124-51-rohs-l-3-2689454.pdf?src-supplier=Digi-Key, ComponentLink6Description=https://datasheet.ciiva.com/2689/pyu-yc-tc124-51-rohs-l-3-2689455.pdf?src-supplier=Digi-Key, ComponentLink6URL=https://datasheet.ciiva.com/2689/pyu-yc-tc124-51-rohs-l-3-2689455.pdf?src-supplier=Digi-Key, ComponentLink7Description=https://datasheet.ciiva.com/8311/pyu-yc-tc124-51-rohs-l-2-8311759.pdf?src-supplier=Avnet, ComponentLink7URL=https://datasheet.ciiva.com/8311/pyu-yc-tc124-51-rohs-l-2-8311759.pdf?src-supplier=Avnet, Depth=1mm, Height=0.022inch, Lead Free="Lead Free", Length=0.079inch, Manufacturer Part Number=YC124-FR-0749R9L, Military Standard=Not, Mount="Surface Mount", Number of Circuits=4, Number of Elements=4, Number of Pins=8, Number of Terminals/Pins=8, Packaging="Tape and Reel", Power Per Element=62.5mW, Pricing 1="1=0.35000, 10=0.29700, 25=0.21560, 50=0.15640, 100=0.11590, 250=0.08896, 500=0.07010, 1000=0.04853, 5000=0.04044 (USD)", Radiation Hardening=No, Resistance=49.9R, RoHS=Yes, Stock 1=76594, Supplier 1=Digi-Key, Terminal Pitch=0.5mm, Termination=Convex, Width=0.039inch
RP2: library part YC124-JR-0722RL, "RES ARRAY 4 RES 22 OHM 0804", Case Code (Imperial)=0402, Case Code (Metric)=1005, Manufacturer=Yageo, Max Operating Temperature=155°C, Min Operating Temperature=-55°C, Number of Resistors=4, Package Quantity=1, Power Dissipation=62.5mW, Resistance=22R, Supplier Part Number 1=YC124J-22CT-ND, Temperature Coefficient=200ppm/°C, Tolerance=5%, Voltage Rating=50V, Case/Package=0402, Category="Resistor Arrays", Circuit Type=Isolated, ComponentLink1Description=https://datasheet.ciiva.com/2688/pyu-yc-tc124-51-rohs-l-3-2688672.pdf?src-supplier=Digi-Key, ComponentLink1URL=https://datasheet.ciiva.com/2688/pyu-yc-tc124-51-rohs-l-3-2688672.pdf?src-supplier=Digi-Key, ComponentLink2Description=https://datasheet.ciiva.com/2688/pyu-yc-tc124-51-rohs-l-3-2688673.pdf?src-supplier=Digi-Key, ComponentLink2URL=https://datasheet.ciiva.com/2688/pyu-yc-tc124-51-rohs-l-3-2688673.pdf?src-supplier=Digi-Key, ComponentLink3Description=https://datasheet.ciiva.com/8017/1508227-8017861.pdf?src-supplier=Element14, ComponentLink3URL=https://datasheet.ciiva.com/8017/1508227-8017861.pdf?src-supplier=Element14, ComponentLink4Description=https://datasheet.ciiva.com/7620/442851-7620729.pdf?src-supplier=Element14, ComponentLink4URL=https://datasheet.ciiva.com/7620/442851-7620729.pdf?src-supplier=Element14, ComponentLink5Description=https://datasheet.ciiva.com/8017/1508227-8017862.pdf?src-supplier=Element14, ComponentLink5URL=https://datasheet.ciiva.com/8017/1508227-8017862.pdf?src-supplier=Element14, ComponentLink6Description=https://datasheet.ciiva.com/17067/pyu-yc-tc124-51-rohs-l-3-17067068.pdf?src-supplier=Future+Electronics, ComponentLink6URL=https://datasheet.ciiva.com/17067/pyu-yc-tc124-51-rohs-l-3-17067068.pdf?src-supplier=Future+Electronics, ComponentLink7Description=https://datasheet.ciiva.com/2688/pyu-yc-tc124-51-rohs-l-3-2688671.pdf?src-supplier=Digi-Key, ComponentLink7URL=https://datasheet.ciiva.com/2688/pyu-yc-tc124-51-rohs-l-3-2688671.pdf?src-supplier=Digi-Key, Depth=1mm, Height=0.022inch, Lead Free="Lead Free", Length=0.079inch, Manufacturer Part Number=YC124-JR-0722RL, Military Standard=Not, Mount="Surface Mount", Number of Circuits=4, Number of Contacts=8, Number of Elements=4, Number of Pins=8, Number of Terminals/Pins=8, Packaging="Tape and Reel", Power Per Element=62.5mW, Power Rating=62.5mW, Pricing 1="1=0.10000, 10=0.07100, 25=0.05120, 50=0.03900, 100=0.02880, 250=0.02196, 500=0.01756, 1000=0.01293, 5000=0.00927 (USD)", REACH SVHC=Unknown, RoHS=Yes, Stock 1=239833, Supplier 1=Digi-Key, Terminal Pitch=0.5mm, Termination=Convex, Width=0.039inch, Working Voltage=50V
T1 T2: "t600,601", Built_By=EMA_Matt, Copyright="Copyright (C) 2018 Accelerated Designs. All rights reserved", Datasheet=https://product.tdk.com/info/en/catalog/datasheets/090007/trans_alt_en.pdf, Manufacturer_Part_Number=ALT3232M-151-T001, RefDes=RefDes, SourceLibrary=Add_to_database_2020-10-23, Type=DEV, Vendor=TDK
TP1 TP2 TP3 TP4 TP5 TP6: "PC Test Point, Miniature Phosphor Bronze, Silver Plating Surface Mount Mounting Type", Package="2010 Keystone", Digi-Key_Part_Number=36-5019CT-ND, Digi-Key_Purchase_URL=https://www.digikey.com/product-detail/en/keystone-electronics/5019/36-5019CT-ND/3907344?utm_source=snapeda&utm_medium=aggregator&utm_campaign=symbol, MF="Keystone Electronics", MP=5019, SnapEDA_Link=https://www.snapeda.com/parts/5019/Keystone%20Electronics/view-part/449144/?ref=snap
U1: "10/100 Base-Tx Physical Layer Transceiver, Eee, Wol / 24 Vqfn 4X4X0.9Mm T/r", Built_By=EMA_Cory, Copyright="Copyright (C) 2018 Accelerated Designs. All rights reserved", Datasheet=https://ww1.microchip.com/downloads/en/DeviceDoc/00002298A.pdf, Manufacturer_Part_Number=KSZ8091RNDCA-TR, RefDes=RefDes, SourceLibrary=Microchip_2020-10-12, Type=DEV, Vendor=Microchip
U2: "Single pole Single Throw switch"
U3: "Quad SPI Memory; Flash Serial 3V 64Mbit 64M x 1Bit 8-Pin SOIJ", Built_By=EMA_Cory, Copyright="Copyright (C) 2018 Accelerated Designs. All rights reserved", Datasheet=https://ww1.microchip.com/downloads/en/DeviceDoc/SST26VF064B-SST26VF064BA-2.5V-3.0V-64-Mbit-Serial-Quad-IO-Flash-Memory-Data-Sheet-DS20005119J.pdf, Manufacturer_Part_Number=SST26VF064B-104I/SM, RefDes=RefDes, SourceLibrary=Microchip_2020-09-08, Type=DEV, Vendor=Microchip
U4: "https://www.ti.com/product/TS3A4751?HQS=TI-null-null-octopart-df-pf-null-wwe", Manufacturer="Texas Instruments", PACKAGE_DESIGNATOR=RUC, Copyright="Copyright (C) 2018 Accelerated Designs. All rights reserved", Datasheet_URL=http://www.ti.com/lit/gpn/TS3A4751, FAMILY_NAME="ANALOG SWITCH OR MULTIPLEXER (less than or equal to 5V)", GENERIC_PART_NUMBER=TS3A4751, INDUSTRY_STD_PKG_TYPE=QFN, Manufacturer_Part_Number=TS3A4751RUCR, PIN_COUNT=14, RefDes=RefDes, Type=DEV, Vendor="Texas Instruments"
U5: "MCU 32-bit ARM Cortex M4 RISC 2MB Flash 3.3V 100-Pin TQFP Tray", Manufacturer="Silicon Labs", Supplier Part Number 1=634-B420F2048GQ100-B, Manufacturer Part Number=EFM32GG11B420F2048GQ100-B, Pricing 1="1=9.00000, 10=8.84000, 25=8.69000, 50=8.52000, 100=8.35000, 250=8.34000, 500=8.32000, 1000=8.30000 (USD)", RoHS=No, Stock 1=140, Supplier 1=Mouser
U6: "U400", Built_By=EMA_UL_Team, Copyright="Copyright (C) 2018 Accelerated Designs. All rights reserved", Manufacturer_Part_Number=AP2151WG-7, RefDes=RefDes, SourceLibrary=DIODESINC_2_2015-08-18, Type=DEV, Vendor="Diodes Inc"
U7: library part LP3982ILD-ADJ, "https://www.ti.com/product/LP3982?HQS=TI-null-null-octopart-df-pf-null-wwe", Manufacturer_Part_Number=LP3982ILD-ADJ/NOPB, Built_By=EMA_UL_Team, Copyright="Copyright (C) 2018 Accelerated Designs. All rights reserved", RefDes=RefDes, SourceLibrary=TI_2019-03-28, Type=DEV, Vendor="Texas Instruments"
X1: library part ECS-500-8-47B-CWY-TR, "CRYSTAL 50.0000MHZ 8PF SMD", Package=None, Availability=Warning, Check_prices=https://www.snapeda.com/parts/ECS-500-8-47B-CWY-TR/ECS%20Inc./view-part/5049033/?ref=eda, MF="ECS Inc.", MP=ECS-500-8-47B-CWY-TR, Price=None, Purchase-URL=https://pricing.snapeda.com/search/part/ECS-500-8-47B-CWY-TR/?ref=eda, SnapEDA_Link=https://www.snapeda.com/parts/ECS-500-8-47B-CWY-TR/ECS%20Inc./view-part/5049033/?ref=snap
X2: library part FC-135_32.7680KA-A0, "32.768kHz Â±20ppm Crystal 12.5pF 70 kOhms 2-SMD, No Lead", Package="SMD-2 Epson", Availability=Unavailable, MF=EPSON, MP="FC-135 32.7680KA-A0", Price=None, SnapEDA_Link=https://www.snapeda.com/parts/FC-135%2032.7680KA-A0/EPSON/view-part/51409/?ref=snap

## Via types
v1: diameter 25, hole 13, Top Layer to Bottom Layer, 83 vias
v2: diameter 25, hole 15, Top Layer to Bottom Layer, 12 vias
v3: diameter 50, hole 28, Top Layer to Bottom Layer, 3 vias